# Altium PCB U2S_HVPP.PCBDOC
Units mm, origin at the board's own origin, x right, y up, seen from the top; angles counter-clockwise.
Board outline 114.3 x 63.5 mm, 2 copper layers (Top Layer, Bottom Layer); 54 components, 107 nets, 352 pads, 56 vias.
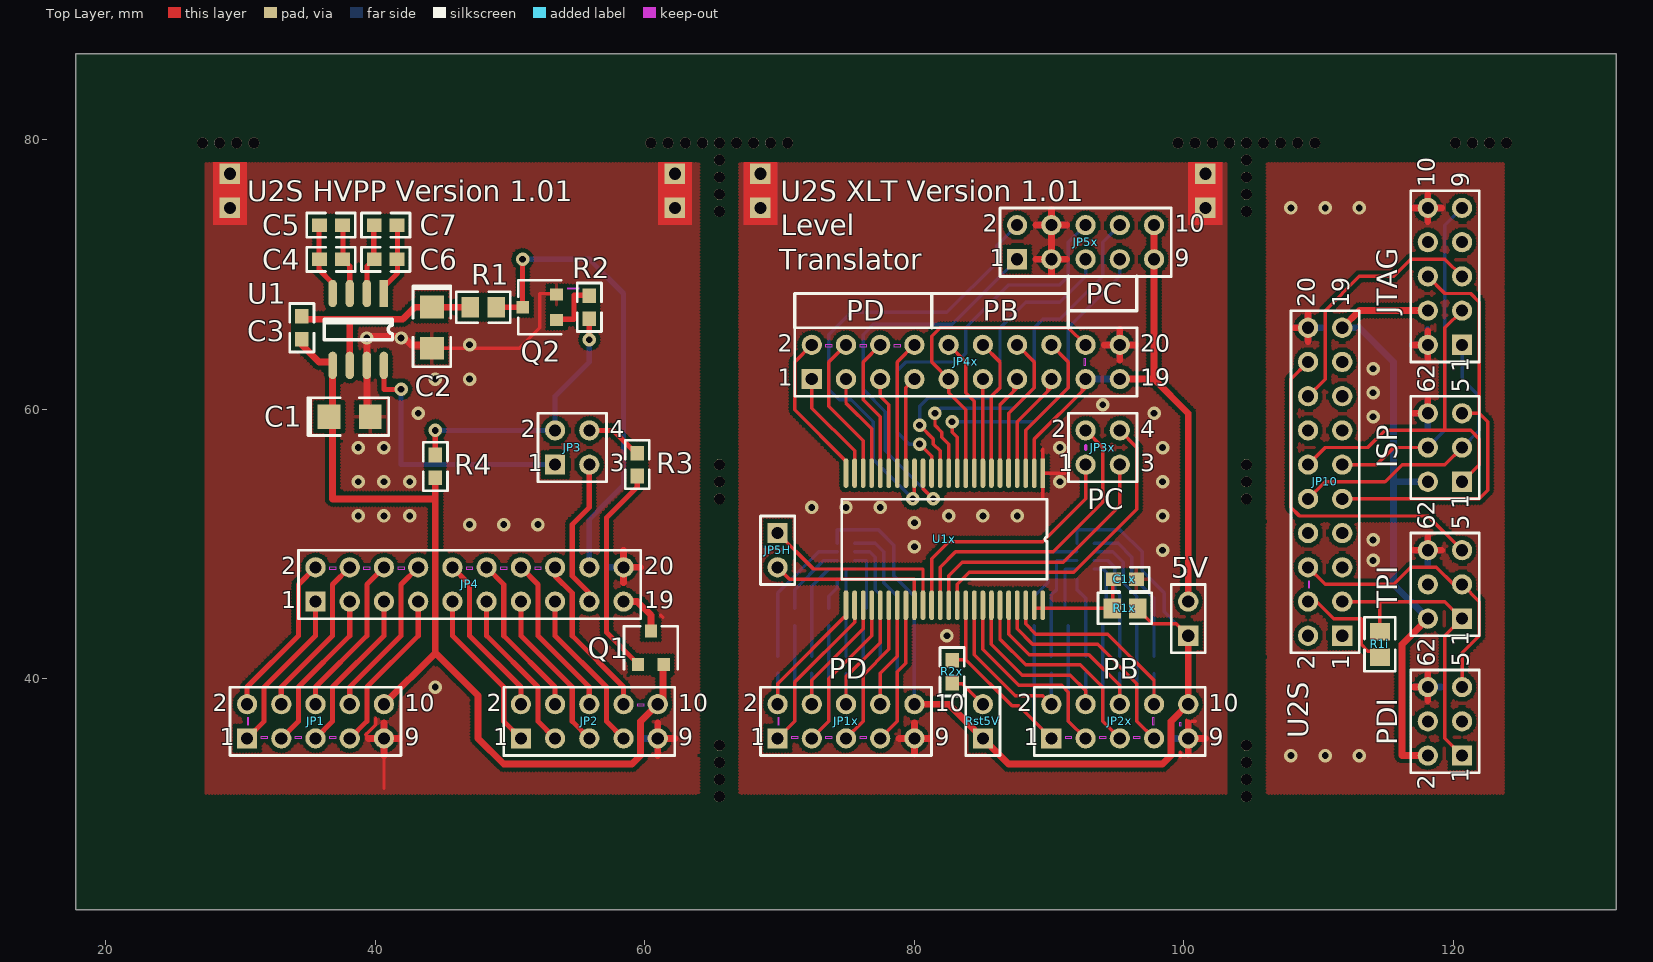
[diagram p0: Top Layer view]
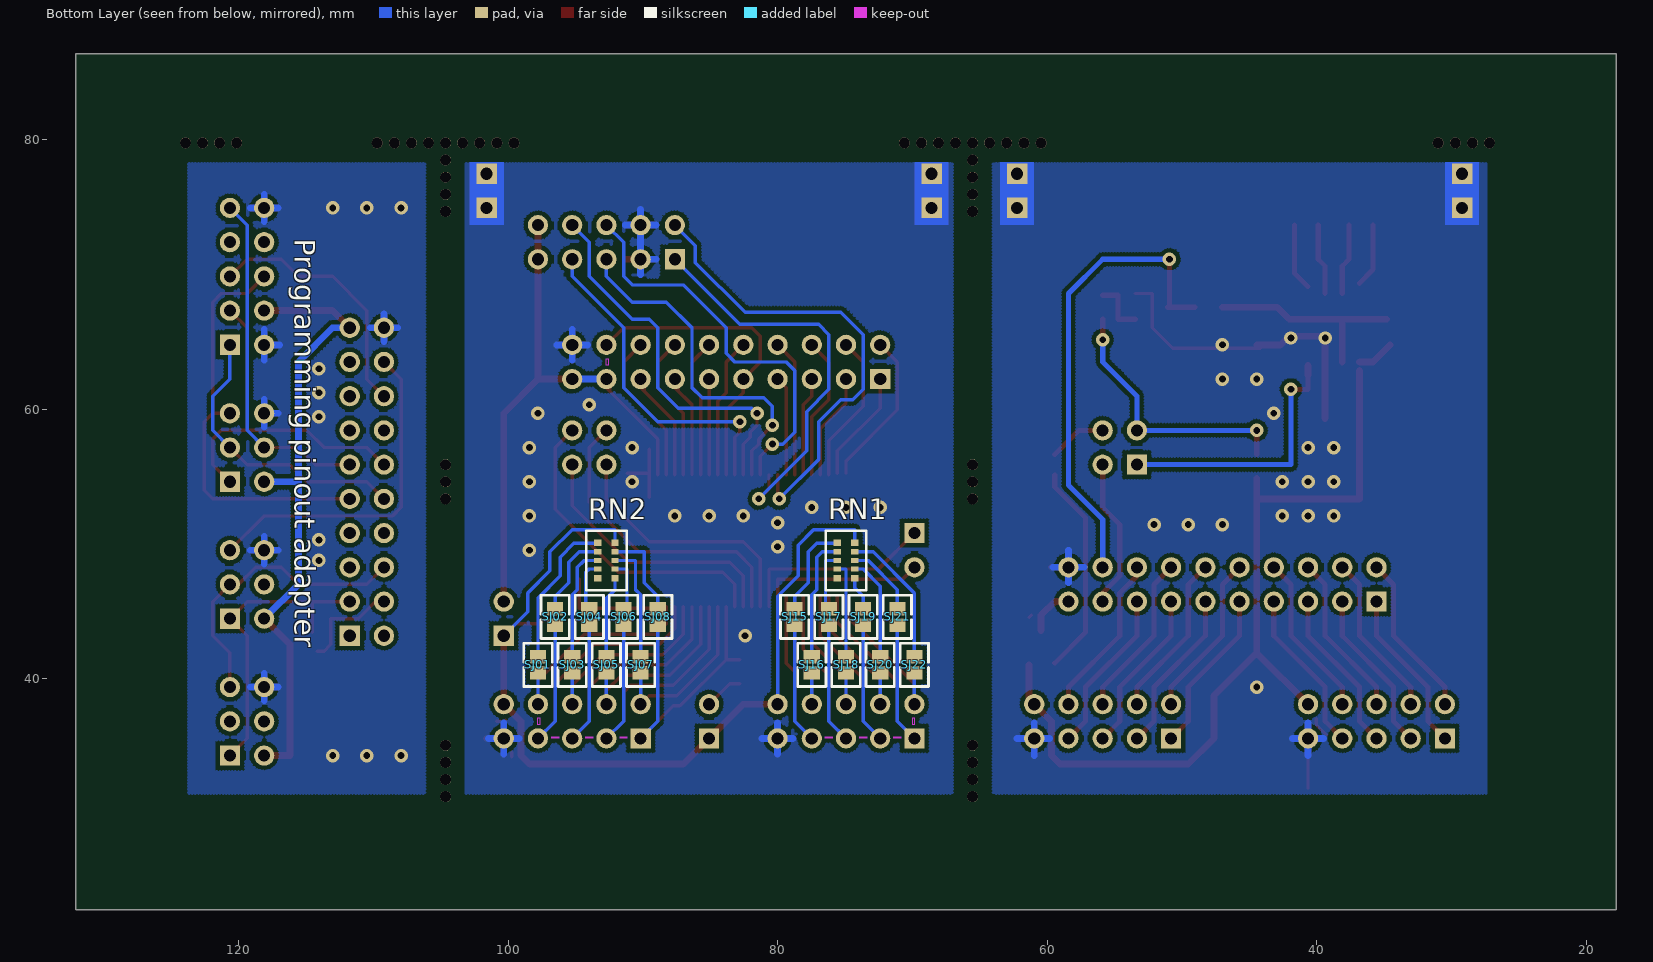
[diagram p1: Bottom Layer view, seen from below]

## Layer stack, top to bottom
Top Layer: signal copper 0.0356
Dielectric: dielectric 0.32, FR-4, Dk 4.8
Bottom Layer: signal copper 0.0356

## Board outline
17.78,22.86 132.08,22.86 132.08,86.36 17.78,86.36

## Design rules (kind name [scope] priority, off if disabled: settings)
Clearance Clearance_1 [inpoly] p1: gap=0.305
Clearance [All] p2: gap=0.178
ComponentClearance [All] p1: gap=0.254 collisioncheckmode=0
PolygonConnect [All] p1: connectstyle=Relief reliefconductorwidth=0.254 reliefentries=4 polygonreliefangle="90 Angle"
RoutingLayers [All] p1: top layer=Horizontal bottom layer=Vertical
RoutingVias [All] p1: holewidth=0.711 width=1.27 viastyle="Through Hole" minholewidth=0.711 minwidth=1.27 maxholewidth=0.711 maxwidth=1.27
SolderMaskExpansion [All] p1: expansion=0.178
TestPointUsage [All] p1: valid=0 allowmultiple=FALSE
Testpoint [All] p1: side=15 testpointundercomponent=TRUE minsize=1.016 maxsize=2.54 preferedsize=1.524 minholesize=0 maxholesize=1.016 preferedholesize=0.813 testpointgrid=0.025 style=1023 order=1234567890
Width [All] p1: maxlimit=2.54 minlimit=0.254 preferedwidth=0.254 minimp=50.000000 maximp=50.000000 favimp=50.000000
16 further rules are at their usual default settings.

## Classes and differential pairs
component class XLAT: 5V C1x JP1x JP2x JP3x JP4x JP5H JP5x R1x R2x RN1 RN2 Rst5V SJ01 SJ02 SJ03 SJ04 SJ05 SJ06 SJ07 SJ08 SJ15 SJ16 SJ17 SJ18 SJ19 SJ20 SJ21 SJ22 U1x
component class U2S_HVPP: C1 C2 C3 C4 C5 C6 C7 JP1 JP2 JP3 JP4 Q1 Q2 R1 R2 R3 R4 U1
component class ISP_JTAG: ISP JP10 JTAG PDI R1i TPI

## Components (designator, comment, footprint, x,y, rotation, side; value= is the part's Value field where it differs from the comment)
5V "Header 2" HDR1X2 100.33,43.18 r90 top
C1 "Capacitor Ta" TR3A 38.1,59.436 r0 top
C1x "Capacitor" SMD0603 95.631,47.371 r180 top
C2 "Capacitor Ta" TR3A 44.196,66.04 r270 top
C3 "Capacitor" SMD0603 34.544,66.04 r90 top
C4 "Capacitor" SMD0603 36.703,71.12 r0 top
C5 "Capacitor" SMD0603 36.703,73.66 r0 top
C6 "Capacitor" SMD0603 40.767,71.12 r180 top
C7 "Capacitor" SMD0603 40.767,73.66 r0 top
ISP "Header 3X2" HDR2X3 120.65,54.61 r90 top
JP1 "Header 5X2" HDR2X5 30.48,35.56 r0 top
JP1x "Header 5X2" HDR2X5 69.85,35.56 r0 top
JP2 "Header 5X2" HDR2X5 50.8,35.56 r0 top
JP2x "Header 5X2" HDR2X5 90.17,35.56 r0 top
JP3 "Header 2X2" HDR2X2#1 53.34,55.88 r0 top
JP3x "Header 2X2" HDR2X2#2 92.71,55.88 r0 top
JP4 "Header 10X2" HDR2X10 35.56,45.72 r0 top
JP4x "Header 10X2" HDR2X10 72.39,62.23 r0 top
JP5H "Header 2" HDR1X2 69.85,50.8 r270 top
JP5x "Header 5X2" HDR2X5 87.63,71.12 r0 top
JP10 "Header 10X2" HDR2X10 111.76,43.18 r90 top
JTAG "Header 5X2" HDR2X5 120.65,64.77 r90 top
PDI "Header 3X2" HDR2X3 120.65,34.29 r90 top
Q1 "BC857_PNP" SOT23 60.452,42.291 r0 top
Q2 "BC847_NPN" SOT23 52.197,67.564 r90 top
R1 "Resistor" SMD0805 48.006,67.564 r0 top
R1i "Resistor" SMD0805 114.554,42.545 r90 top
R1x "Resistor" SMD0805 95.631,45.212 r0 top
R2 "Resistor" SMD0603 55.88,67.564 r90 top
R2x "Resistor" SMD0603 82.804,40.513 r270 top
R3 "Resistor" SMD0603 59.436,55.88 r270 top
R4 "Resistor" SMD0603 44.45,55.753 r90 top
RN1 "YC158" YC158 74.93,48.768 r180 bottom
RN2 "YC158" YC158 92.71,48.768 r180 bottom
Rst5V "Header 2" HDR1X2 85.09,35.56 r90 top
SJ01 "Jumper" Jumper 97.79,41.021 r270 bottom
SJ02 "Jumper" Jumper 96.52,44.577 r270 bottom
SJ03 "Jumper" Jumper 95.25,41.021 r270 bottom
SJ04 "Jumper" Jumper 93.98,44.577 r270 bottom
SJ05 "Jumper" Jumper 92.71,41.021 r270 bottom
SJ06 "Jumper" Jumper 91.44,44.577 r270 bottom
SJ07 "Jumper" Jumper 90.17,41.021 r270 bottom
SJ08 "Jumper" Jumper 88.9,44.577 r270 bottom
SJ15 "Jumper" Jumper 78.74,44.577 r270 bottom
SJ16 "Jumper" Jumper 77.47,41.021 r270 bottom
SJ17 "Jumper" Jumper 76.2,44.577 r270 bottom
SJ18 "Jumper" Jumper 74.93,41.021 r270 bottom
SJ19 "Jumper" Jumper 73.66,44.577 r270 bottom
SJ20 "Jumper" Jumper 72.39,41.021 r270 bottom
SJ21 "Jumper" Jumper 71.12,44.577 r270 bottom
SJ22 "Jumper" Jumper 69.85,41.021 r270 bottom
TPI "Header 3X2" HDR2X3 120.65,44.45 r90 top
U1 "ST662" SO8 40.64,68.58 r270 top
U1x "GTL2000DL" SSOP48 89.535,55.245 r270 top

## Footprints (in the part's own frame and the unit in brackets; to place one, negate y for a bottom-side part, rotate by r counter-clockwise, add the part's x,y. Pads: shape width x height; smd on the part's side, far side on the other; paste and mask are expansions set on the pad)
HDR1X2 [mm] "Connector; Header; 2 Position"
  rect 1.5x1.5 hole 0.9: 1(0,0)
  round 1.5 hole 0.9: 2(2.54,0)
  silkscreen extent -1.27,-1.27 3.81,1.27
HDR2X2#1 [mm] "Connector; Header; 2x2 Position"
  rect 1.5x1.5 hole 0.9: 1(0,0)
  round 1.5 hole 0.9: 2(0,2.54) 3(2.54,0) 4(2.54,2.54)
  silkscreen extent -1.27,-1.27 3.81,3.81
HDR2X2#2 [mm] "Connector; Header; 2x2 Position"
  round 1.5 hole 0.9: 1(0,0) 2(0,2.54) 3(2.54,0) 4(2.54,2.54)
  silkscreen extent -1.27,-1.27 3.81,3.81
HDR2X3 [mm] "Connector; Header; 3x2 Position"
  rect 1.5x1.5 hole 0.9: 1(0,0)
  round 1.5 hole 0.9: 2(0,2.54) 3(2.54,0) 4(2.54,2.54) 5(5.08,0) 6(5.08,2.54)
  silkscreen extent -1.27,-1.27 6.35,3.81
HDR2X5 [mm] "Connector; Header; 5x2 Position"
  rect 1.5x1.5 hole 0.9: 1(0,0)
  round 1.5 hole 0.9: 2(0,2.54) 3(2.54,0) 4(2.54,2.54) 5(5.08,0) 6(5.08,2.54) 7(7.62,0) 8(7.62,2.54) 9(10.16,0) 10(10.16,2.54)
  silkscreen extent -1.27,-1.27 11.43,3.81
HDR2X10 [mm] "Connector; Header; 10x2 Position"
  rect 1.5x1.5 hole 0.9: 1(0,0)
  round 1.5 hole 0.9: 2(0,2.54) 3(2.54,0) 4(2.54,2.54) 5(5.08,0) 6(5.08,2.54) 7(7.62,0) 8(7.62,2.54) 9(10.16,0) 10(10.16,2.54) 11(12.7,0) 12(12.7,2.54) 13(15.24,0) 14(15.24,2.54) 15(17.78,0) 16(17.78,2.54) 17(20.32,0) 18(20.32,2.54) 19(22.86,0) 20(22.86,2.54)
  silkscreen extent -1.27,-1.27 24.13,3.81
Jumper [mm] "Solder Jumper"
  rect 1x1.2 smd: 1(-0.6,0) 2(0.6,0)
  silkscreen extent -1.6,-1.05 1.6,1.05
SMD0603 [mm]
  rect 1.1x1 smd: 1(-0.85,0) 2(0.85,0)
  silkscreen extent -1.8,-0.9 1.8,0.9
SMD0805 [mm]
  rect 1.3x1.5 smd: 1(-0.95,0) 2(0.95,0)
  silkscreen extent -2,-1.15 2,1.15
SO8 [mil]
  rect 80x25 smd: 1(0,0)
  oval 80x25 smd: 2(0,-50) 3(0,-100) 4(0,-150) 5(210,-150) 6(210,-100) 7(210,-50) 8(210,0)
  silkscreen extent 75,-175 135,25
SOT23 [mm]
  rect 0.9x0.95 smd: B(-0.95,-1.25) C(0,1.25) E(0.95,-1.25)
  silkscreen extent -2,-1.6 2,1.6
SSOP48 [mm]
  rect 2.2x0.35 smd: 1(0,0)
  oval 2.2x0.35 smd: 2(0,-0.635) 3(0,-1.27) 4(0,-1.905) 5(0,-2.54) 6(0,-3.175) 7(0,-3.81) 8(0,-4.445) 9(0,-5.08) 10(0,-5.715) 11(0,-6.35) 12(0,-6.985) 13(0,-7.62) 14(0,-8.255) 15(0,-8.89) 16(0,-9.525) 17(0,-10.16) 18(0,-10.795) 19(0,-11.43) 20(0,-12.065) 21(0,-12.7) 22(0,-13.335) 23(0,-13.97) 24(0,-14.605) 25(9.8,-14.605) 26(9.8,-13.97) 27(9.8,-13.335) 28(9.8,-12.7) 29(9.8,-12.065) 30(9.8,-11.43) 31(9.8,-10.795) 32(9.8,-10.16) 33(9.8,-9.525) 34(9.8,-8.89) 35(9.8,-8.255) 36(9.8,-7.62) 37(9.8,-6.985) 38(9.8,-6.35) 39(9.8,-5.715) 40(9.8,-5.08) 41(9.8,-4.445) 42(9.8,-3.81) 43(9.8,-3.175) 44(9.8,-2.54) 45(9.8,-1.905) 46(9.8,-1.27) 47(9.8,-0.635) 48(9.8,0)
  silkscreen extent 1.93,-14.92 7.87,0.32
TR3A [mm]
  rect 1.7x1.8 smd: 1(-1.525,0) 2(1.525,0)
  silkscreen extent -3.1,-1.4 2.9,1.4
YC158 [mm]
  rect 0.55x0.486 smd: 1(-0.636,1.33) 5(-0.635,-1.33) 6(0.635,-1.33) 10(0.635,1.33)
  rect 0.55x0.386 smd: 2(-0.635,0.64) 3(-0.635,0) 4(-0.635,-0.64) 7(0.635,-0.64) 8(0.635,0) 9(0.635,0.64)
  silkscreen extent -1.5,-2.2 1.5,2.2

## Part data
5V JP5H Rst5V: "Header, 2-Pin"
ISP PDI TPI: "Header, 3-Pin, Dual row"
JP1 JP1x JP2 JP2x JP5x JTAG: "Header, 5-Pin, Dual row"
JP3 JP3x: "Header, 2-Pin, Dual row"
JP4 JP4x JP10: "Header, 10-Pin, Dual row"
Q1: library part Transistor_PNP
Q2: library part Transistor_NPN
SJ01 SJ02 SJ03 SJ04 SJ05 SJ06 SJ07 SJ08 SJ15 SJ16 SJ17 SJ18 SJ19 SJ20 SJ21 SJ22: "Solder Jumper"

## Free pads (board coordinates)
  round 0.8 hole 0.8 unplated: 0(27.178,79.756) 0(28.448,79.756) 0(29.718,79.756) 0(30.988,79.756) 0(60.452,79.756) 0(61.722,79.756) 0(62.992,79.756) 0(64.262,79.756) 0(65.532,31.242) 0(65.532,32.512) 0(65.532,33.782) 0(65.532,35.052) 0(65.532,53.34) 0(65.532,54.61) 0(65.532,55.88) 0(65.532,74.676) 0(65.532,75.946) 0(65.532,77.216) 0(65.532,78.486) 0(65.532,79.756) 0(66.802,79.756) 0(68.072,79.756) 0(69.342,79.756) 0(70.612,79.756) 0(99.568,79.756) 0(100.838,79.756) 0(102.108,79.756) 0(103.378,79.756) 0(104.648,31.242) 0(104.648,32.512) 0(104.648,33.782) 0(104.648,35.052) 0(104.648,53.34) 0(104.648,54.61) 0(104.648,55.88) 0(104.648,74.676) 0(104.648,75.946) 0(104.648,77.216) 0(104.648,78.486) 0(104.648,79.756) 0(105.918,79.756) 0(107.188,79.756) 0(108.458,79.756) 0(109.728,79.756) 0(120.142,79.756) 0(121.412,79.756) 0(122.682,79.756) 0(123.952,79.756)
  rect 1.524x1.524 hole 0.9: P1(29.21,74.93) P1x(68.58,74.93) P2(29.21,77.47) P2x(68.58,77.47) P3(62.23,74.93) P3x(101.6,74.93) P4(62.23,77.47) P4x(101.6,77.47)

## Via types
v1: diameter 1, hole 0.5, Top Layer to Bottom Layer, tented both sides, 56 vias

## Nets (pads, with @x,y where several pads share a name; then routed paths per layer and width w, separated by ;. In a path a pad name is that pad's centre, name@x,y a point inside that pad or via, vN(x,y) a via of type N, cw(c..) or ccw(c..) an arc to the next point about the centre after c; other vN are vias at no path point)
C0: JP2.1 JP4.9 | length 12.3
  Top Layer w0.381: JP4.9 45.72,43.18 49.53,39.37 49.53,36.83 JP2.1
C1: JP2.2 JP4.10 | length 12.3
  Top Layer w0.381: JP4.10 46.99,46.99 46.99,43.18 50.8,39.37 JP2.2
C2: JP2.3 JP4.11 | length 12.3
  Top Layer w0.381: JP4.11 48.26,43.18 52.07,39.37 52.07,36.83 JP2.3
C3: JP2.4 JP4.12 | length 12.3
  Top Layer w0.381: JP4.12 49.53,46.99 49.53,43.18 53.34,39.37 JP2.4
C4: JP2.5 JP4.13 | length 12.3
  Top Layer w0.381: JP4.13 50.8,43.18 54.61,39.37 54.61,36.83 JP2.5
C5: JP2.6 JP4.14 | length 12.3
  Top Layer w0.381: JP4.14 52.07,46.99 52.07,43.18 55.88,39.37 JP2.6
C6: JP2.7 JP4.15 | length 12.3
  Top Layer w0.381: JP4.15 53.34,43.18 57.15,39.37 57.15,36.83 JP2.7
C7: JP2.8 JP4.16 | length 12.3
  Top Layer w0.381: JP4.16 53.34,47.625 54.61,46.355 54.61,43.18 58.42,39.37 JP2.8
D0: JP1.1 JP4.1 | length 12.3
  Top Layer w0.381: JP1.1 31.75,36.83 31.75,39.37 35.56,43.18 JP4.1
D1: JP1.2 JP4.2 | length 12.3
  Top Layer w0.381: JP1.2 30.48,39.37 34.29,43.18 34.29,46.99 JP4.2
D01: JP2x.8 SJ01.2 U1x.46 | length 16.6
  Top Layer w0.254: U1x.46@88.265,45.339 88.265,44.069 89.027,43.307 94.361,43.307 97.79,39.878 JP2x.8
  Bottom Layer w0.254: JP2x.8 SJ01.2@97.79,40.386
D2: JP1.3 JP4.3 | length 12.3
  Top Layer w0.381: JP1.3 34.29,36.83 34.29,39.37 38.1,43.18 JP4.3
D02: JP2x.7 SJ02.2 U1x.45 | length 25.7
  Top Layer w0.254: U1x.45@87.63,45.339 87.63,43.688 88.773,42.545 93.599,42.545 96.52,39.624 96.52,36.83 JP2x.7
  Bottom Layer w0.254: SJ02.2@96.52,43.942 96.52,36.83 JP2x.7
D3: JP1.4 JP4.4 | length 12.3
  Top Layer w0.381: JP1.4 33.02,39.37 36.83,43.18 36.83,46.99 JP4.4
D03: JP2x.6 SJ03.2 U1x.44 | length 15.5
  Top Layer w0.254: U1x.44@86.995,45.339 86.995,43.307 88.519,41.783 92.964,41.783 95.25,39.497 JP2x.6
  Bottom Layer w0.254: JP2x.6 SJ03.2@95.25,40.386
D4: JP1.5 JP4.5 | length 12.3
  Top Layer w0.381: JP1.5 36.83,36.83 36.83,39.37 40.64,43.18 JP4.5
D04: JP2x.5 SJ04.2 U1x.43 | length 24.8
  Top Layer w0.254: U1x.43@86.36,45.339 86.36,42.926 88.265,41.021 92.329,41.021 93.98,39.37 93.98,36.83 JP2x.5
  Bottom Layer w0.254: SJ04.2@93.98,43.942 93.98,36.83 JP2x.5
D5: JP1.6 JP4.6 | length 12.3
  Top Layer w0.381: JP1.6 35.56,39.37 39.37,43.18 39.37,46.99 JP4.6
D05: JP2x.4 SJ05.2 U1x.42 | length 14.5
  Top Layer w0.254: U1x.42@85.725,45.339 85.725,42.545 88.011,40.259 91.567,40.259 92.71,39.116 JP2x.4
  Bottom Layer w0.254: JP2x.4 SJ05.2@92.71,40.386
D6: JP1.7 JP4.7 | length 12.3
  Top Layer w0.381: JP1.7 39.37,36.83 39.37,39.37 43.18,43.18 JP4.7
D06: JP2x.3 SJ06.2 U1x.41 | length 23.7
  Top Layer w0.254: U1x.41@85.09,45.339 85.09,42.164 87.757,39.497 90.932,39.497 91.44,38.989 91.44,36.83 JP2x.3
  Bottom Layer w0.254: SJ06.2@91.44,43.942 91.44,36.83 JP2x.3
D7: JP1.8 JP4.8 | length 12.3
  Top Layer w0.381: JP1.8 38.1,39.37 41.91,43.18 41.91,46.99 JP4.8
D07: JP2x.2 SJ07.2 U1x.40 | length 13.1
  Top Layer w0.254: U1x.40@84.455,45.339 84.455,41.783 87.503,38.735 89.535,38.735 JP2x.2
  Bottom Layer w0.254: JP2x.2 SJ07.2@90.17,40.386
D08: JP2x.1 R2x.1 SJ08.2 U1x.39 | length 22.6
  Top Layer w0.254: R2x.1@82.804,41.402 83.82,41.402 ; U1x.39@83.82,45.339 83.82,41.402 ; JP2x.1 87.757,37.973 87.249,37.973 83.82,41.402
  Bottom Layer w0.254: SJ08.2@88.9,43.942 88.9,36.83 JP2x.1
D09: JP3x.4 U1x.38 | length 23.7
  Top Layer w0.254: U1x.38@83.185,45.339 83.185,46.99 84.074,47.879 91.821,47.879 96.52,52.578 96.52,57.15 JP3x.4
D10: JP3x.3 U1x.37 | length 20.2
  Top Layer w0.254: U1x.37@82.55,45.339 82.55,47.625 83.566,48.641 91.059,48.641 95.25,52.832 JP3x.3
D11: JP3x.2 U1x.36 | length 22.8
  Top Layer w0.254: U1x.36@81.915,45.339 81.915,48.26 83.058,49.403 90.297,49.403 93.98,53.086 93.98,57.15 JP3x.2
D12: JP3x.1 U1x.35 | length 19.4
  Top Layer w0.254: U1x.35@81.28,45.339 81.28,48.895 82.55,50.165 89.535,50.165 92.71,53.34 JP3x.1
D13: JP5H.1 U1x.34 | length 14.7
  Top Layer w0.254: JP5H.1 72.517,48.133 80.645,48.133 U1x.34@80.645,45.339
D14: JP5H.2 U1x.33 | length 12.6
  Top Layer w0.254: JP5H.2 70.739,47.371 80.01,47.371 U1x.33@80.01,45.339
D15: JP1x.7 SJ15.2 U1x.32 | length 20.2
  Top Layer w0.254: JP1x.7 78.74,36.83 78.74,40.513 79.375,41.148 U1x.32@79.375,46.101
  Bottom Layer w0.254: JP1x.7 78.74,36.83 SJ15.2@78.74,43.942
D16: JP1x.8 SJ16.2 U1x.31 | length 10.8
  Top Layer w0.254: JP1x.8 77.47,40.386 78.74,41.656 U1x.31@78.74,46.101
  Bottom Layer w0.254: JP1x.8 SJ16.2@77.47,40.386
D17: JP1x.5 SJ17.2 U1x.30 | length 20.8
  Top Layer w0.254: JP1x.5 76.2,36.83 76.2,40.259 78.105,42.164 U1x.30@78.105,46.101
  Bottom Layer w0.254: JP1x.5 76.2,36.83 SJ17.2@76.2,43.942
D18: JP1x.6 SJ18.2 U1x.29 | length 11.3
  Top Layer w0.254: JP1x.6 74.93,40.132 77.47,42.672 U1x.29@77.47,46.101
  Bottom Layer w0.254: JP1x.6 SJ18.2@74.93,40.386
D19: JP1x.3 SJ19.2 U1x.28 | length 21.3
  Top Layer w0.254: JP1x.3 73.66,36.83 73.66,40.005 76.835,43.18 U1x.28@76.835,46.101
  Bottom Layer w0.254: JP1x.3 73.66,36.83 SJ19.2@73.66,43.942
D20: JP1x.4 SJ20.2 U1x.27 | length 11.9
  Top Layer w0.254: JP1x.4 72.39,39.878 76.2,43.688 U1x.27@76.2,46.101
  Bottom Layer w0.254: JP1x.4 SJ20.2@72.39,40.386
D21: JP1x.1 SJ21.2 U1x.26 | length 21.8
  Top Layer w0.254: JP1x.1 71.12,36.83 71.12,39.751 75.565,44.196 U1x.26@75.565,46.101
  Bottom Layer w0.254: JP1x.1 71.12,36.83 SJ21.2@71.12,43.942
D22: JP1x.2 SJ22.2 U1x.25 | length 12.4
  Top Layer w0.254: JP1x.2 69.85,39.624 74.93,44.704 U1x.25@74.93,46.101
  Bottom Layer w0.254: JP1x.2 SJ22.2@69.85,40.386
GND: C1.2 C2.2 JP1.9 JP2.9 JP4.20 pad.P1 pad.P2 pad.P3 pad.P4 Q2.E U1.7 | length 54.9
  Top Layer w0.254: 39.294,35.839 40.03,36.576 40.03,37.008 ; 40.64,31.877 JP1.9@40.64,34.925 ; C2.2 50.673,64.516 52.197,66.04 52.197,68.58 Q2.E@53.467,68.58 ; 61.189,44.704 61.341,44.552
  Top Layer w0.508: C1.2@39.37,59.309 39.37,65.405 42.037,65.405 42.672,64.77 C2.2@44.45,64.77 ; 39.497,35.56 41.783,35.56 ; 40.64,34.29 40.64,36.703 ; 58.42,47.117 58.42,49.53 ; JP4.20 59.69,48.26 ; 60.96,34.29 60.96,36.703 ; JP2.9 62.23,35.56
  Bottom Layer w0.508: 39.497,35.56 41.783,35.56 ; 40.64,34.29 40.64,36.703 ; 57.277,48.26 59.563,48.26 ; 58.42,47.117 58.42,49.53 ; 59.817,35.56 62.23,35.56 ; 60.96,34.29 60.96,36.703
  other v1: 44.45,39.37 46.99,51.435 49.53,51.435 52.07,51.435 38.735,52.07 40.64,52.07 42.545,52.07 38.735,54.61 40.64,54.61 42.545,54.61 38.735,57.15 40.64,57.15 43.18,59.69 44.45,62.23 46.99,62.23 46.99,64.77 39.37,65.278 41.91,65.278
GNDX: C1x.1 JP1x.9 JP2x.9 JP4x.20 JP5x.3 JP5x.4 pad.P1x pad.P2x pad.P3x pad.P4x U1x.1 | length 50.1
  Top Layer w0.254: 89.535,53.467 89.535,57.023 ; U1x.1 91.186,55.245 ; 99.746,34.214 99.746,34.544 ; 100.203,36.627 100.203,36.906 ; 100.584,36.83 100.838,36.83
  Top Layer w0.508: 78.867,35.56 81.153,35.56 ; 80.01,34.417 80.01,36.703 ; 89.027,71.12 91.313,71.12 ; 89.027,73.66 91.313,73.66 ; 90.17,69.977 90.17,74.803 ; 94.107,64.77 96.393,64.77 ; 95.25,63.627 95.25,65.913 ; 100.33,34.417 100.33,36.703 ; JP2x.9 101.6,35.56
  Bottom Layer w0.508: 78.867,35.56 81.153,35.56 ; 80.01,34.417 80.01,36.703 ; 89.027,71.12 JP5x.3 ; 89.027,73.66 91.313,73.66 ; 90.17,69.977 90.17,74.803 ; 94.107,64.77 96.393,64.77 ; 95.25,63.627 95.25,65.913 ; 99.187,35.56 101.473,35.56 ; 100.33,34.417 100.33,36.703
  other v1: 82.423,43.18 98.425,49.53 80.01,49.784 80.01,51.562 82.55,52.07 85.09,52.07 87.63,52.07 98.425,52.07 72.39,52.705 74.93,52.705 77.47,52.705 90.805,54.61 98.425,54.61 90.805,57.15 98.425,57.15 97.79,59.69 93.98,60.325
HL: JP3.1 U1.8 | length 20.8
  Top Layer w0.381: U1.8 40.64,61.468 v1(41.91,61.468)
  Top Layer w0.508: U1.8@40.64,62.484 U1.8
  Bottom Layer w0.381: v1(41.91,61.468) 41.91,55.88 JP3.1
HVOUT: C2.1 C3.2 R1.1 U1.6 | length 15.7
  Top Layer w0.508: C3.2@34.798,66.675 42.037,66.675 42.926,67.564 R1.1@46.99,67.564 ; U1.6@38.1,63.5 38.1,66.675
ND01: RN2.1 SJ01.1 | length 11.3
  Bottom Layer w0.254: RN2.1@93.345,50.038 95.123,50.038 96.139,49.022 96.139,47.625 97.79,45.974 SJ01.1@97.79,41.656
ND02: RN2.2 SJ02.1 | length 6.3
  Bottom Layer w0.254: RN2.2@93.345,49.403 94.742,49.403 95.504,48.641 95.504,47.117 96.52,46.101 SJ02.1@96.52,45.212
ND03: RN2.3 SJ03.1 | length 8.5
  Bottom Layer w0.254: RN2.3 94.361,48.768 94.869,48.26 94.869,46.609 95.25,46.228 SJ03.1@95.25,41.656
ND04: RN2.4 SJ04.1 | length 3.7
  Bottom Layer w0.254: RN2.4@93.345,48.133 93.98,48.133 94.234,47.879 SJ04.1@94.234,45.212
ND05: RN2.6 SJ05.1 | length 6
  Bottom Layer w0.254: RN2.6@92.075,47.371 92.075,46.609 92.71,45.974 SJ05.1@92.71,41.656
ND06: RN2.7 SJ06.1 | length 3.8
  Bottom Layer w0.254: SJ06.1@91.186,45.212 91.186,48.133 RN2.7@92.075,48.133
ND07: RN2.8 SJ07.1 | length 8.8
  Bottom Layer w0.254: SJ07.1@90.17,41.656 90.17,46.228 90.551,46.609 90.551,48.768 RN2.8
ND08: RN2.9 SJ08.1 | length 6.8
  Bottom Layer w0.254: SJ08.1@88.9,45.212 88.9,46.101 89.916,47.117 89.916,49.403 RN2.9@92.075,49.403
ND15: RN1.1 SJ15.1 | length 7
  Bottom Layer w0.254: RN1.1@75.565,50.038 77.089,50.038 77.724,49.403 77.724,47.117 78.74,46.101 SJ15.1@78.74,45.212
ND16: RN1.2 SJ16.1 | length 9.2
  Bottom Layer w0.254: RN1.2@75.565,49.403 76.708,49.403 77.089,49.022 77.089,46.609 77.47,46.228 SJ16.1@77.47,41.656
ND17: RN1.3 SJ17.1 | length 4.4
  Bottom Layer w0.254: RN1.3 76.454,48.768 SJ17.1@76.454,45.212
ND18: RN1.4 SJ18.1 | length 7.1
  Bottom Layer w0.254: SJ18.1@74.93,41.656 74.93,48.133 RN1.4@75.565,48.133
ND19: RN1.6 SJ19.1 | length 2.4
  Bottom Layer w0.254: SJ19.1@73.66,45.212 73.66,46.101 74.295,46.736 RN1.6@74.295,47.371
ND20: RN1.7 SJ20.1 | length 7.6
  Bottom Layer w0.254: SJ20.1@72.39,41.656 72.39,46.863 73.66,48.133 RN1.7@74.295,48.133
ND21: RN1.8 SJ21.1 | length 5.5
  Bottom Layer w0.254: SJ21.1@71.12,45.212 71.12,46.609 73.279,48.768 RN1.8
ND22: RN1.9 SJ22.1 | length 10.4
  Bottom Layer w0.254: SJ22.1@69.85,41.656 69.85,46.355 72.898,49.403 RN1.9@74.295,49.403
P_CLK: ISP.3 JP10.10 JTAG.1 | length 21.7
  Top Layer w0.254: JP10.10 110.49,54.61 114.935,54.61 116.205,55.88 119.38,55.88 ISP.3
  Bottom Layer w0.254: ISP.3 121.92,58.42 121.92,60.96 120.65,62.23 JTAG.1
P_IN: ISP.1 JP10.12 JTAG.3 | length 27.1
  Top Layer w0.254: JP10.12 110.49,57.15 113.665,57.15 114.935,58.42 121.285,58.42 121.92,57.785 121.92,55.88 ISP.1 ; 119.38,58.42 119.38,66.04 JTAG.3
P_OUT: ISP.4 JP10.11 JTAG.9 | length 25.7
  Top Layer w0.254: JP10.11 114.3,55.88 115.57,57.15 ISP.4
  Bottom Layer w0.254: ISP.4 119.38,58.42 119.38,73.66 JTAG.9
P_RST: ISP.5 JP10.9 JTAG.6 | length 31.2
  Top Layer w0.254: JP10.9 121.92,53.34 122.555,53.975 122.555,59.055 121.92,59.69 ; JTAG.6 119.38,68.58 121.285,68.58 121.92,67.945 121.92,59.69 ; ISP.5 121.92,59.69
PCLK: JP10.6 PDI.5 TPI.3 | length 21.7
  Top Layer w0.254: JP10.6 110.49,46.99 115.57,46.99 116.84,48.26 118.745,48.26 120.015,46.99 TPI.3 121.92,45.72 121.92,43.18 120.65,41.91 PDI.5
PD_TX: JP10.4 R1i.1 | length 7.6
  Top Layer w0.254: JP10.4 109.855,45.72 111.125,44.45 113.157,44.45 113.157,42.545 113.665,42.037 R1i.1@114.173,42.037
PDATA: JP10.3 PDI.1 R1i.2 TPI.1 | length 22.9
  Top Layer w0.254: JP10.3 114.554,45.72 ; R1i.2@114.554,43.434 114.554,45.72 ; PDI.1 119.38,35.56 119.38,43.18 TPI.1 119.38,45.72 114.554,45.72
PGND: ISP.6 JP10.20 JTAG.2 JTAG.10 PDI.6 TPI.6 | length 41
  Top Layer w0.508: 108.204,66.04 JP10.20 ; 109.22,65.024 109.22,67.056 ; 117.094,39.37 PDI.6 ; 117.094,49.53 119.126,49.53 ; 117.094,59.69 ISP.6 118.11,60.706 ; 117.094,64.77 JTAG.2 ; 117.094,74.93 119.126,74.93 ; 118.11,38.354 118.11,40.386 ; TPI.6 118.11,50.546 ; 118.11,63.754 118.11,65.786 ; 118.11,73.914 118.11,75.946
  Bottom Layer w0.508: 108.204,66.04 110.236,66.04 ; 109.22,65.024 109.22,67.056 ; 116.967,64.77 JTAG.2 ; 117.094,39.37 119.126,39.37 ; 117.094,49.53 119.126,49.53 ; 117.094,59.69 ISP.6 ; 117.094,74.93 119.126,74.93 ; 118.11,38.354 118.11,40.386 ; 118.11,48.514 118.11,50.546 ; 118.11,58.674 118.11,60.706 ; 118.11,63.627 118.11,65.913 ; 118.11,73.914 118.11,75.946
  other v1: 107.95,34.29 110.49,34.29 113.03,34.29 114.046,48.768 114.046,50.292 114.046,59.436 114.046,61.214 114.046,62.992 107.95,74.93 110.49,74.93 113.03,74.93
PWR_B: Q1.B R3.2 | length 15.9
  Top Layer w0.381: Q1.B@59.436,41.148 57.15,43.434 57.15,51.943 59.436,54.229 R3.2@59.436,55.118
PWR_LOW: JP3.4 R3.1 | length 4.3
  Top Layer w0.381: JP3.4 57.658,58.42 R3.1@59.436,56.642
RST: JP4.18 Q2.C R1.2 | length 35.5
  Top Layer w0.381: R1.2@49.022,67.564 Q2.C@51.054,67.564 ; Q2.C@50.927,67.564 v1(50.927,71.12)
  Bottom Layer w0.381: v1(50.927,71.12) 55.88,71.12 58.42,68.58 58.42,54.356 55.88,51.816 JP4.18
RST_B: Q2.B R2.2 | length 4.2
  Top Layer w0.381: Q2.B@53.467,66.675 54.737,66.675 54.737,68.453 R2.2@55.88,68.453
RST_LOW: JP3.2 R2.1 R4.2 | length 20
  Top Layer w0.381: R4.2@44.45,56.642 v1(44.45,58.42) ; v1(55.88,65.151) R2.1@55.88,66.675
  Bottom Layer w0.381: v1(44.45,58.42) JP3.2 53.34,60.96 55.88,63.5 v1(55.88,65.151)
S01: JP4x.16 U1x.3 | length 11.5
  Top Layer w0.254: U1x.3@88.265,55.118 88.265,58.42 91.44,61.595 91.44,63.5 JP4x.16
S02: JP4x.15 U1x.4 | length 8.5
  Top Layer w0.254: U1x.4@87.63,55.118 87.63,59.055 90.17,61.595 JP4x.15 ; 89.916,61.341 JP4x.15@89.916,61.722
S03: JP4x.14 U1x.5 | length 11
  Top Layer w0.254: U1x.5@86.995,55.118 86.995,59.69 88.9,61.595 88.9,63.5 JP4x.14
S04: JP4x.13 U1x.6 | length 8
  Top Layer w0.254: U1x.6@86.36,55.118 86.36,60.325 87.63,61.595 JP4x.13 ; 87.376,61.341 JP4x.13@87.376,61.722
S05: JP4x.12 U1x.7 | length 10.4
  Top Layer w0.254: JP4x.12 86.36,63.5 86.36,61.595 85.725,60.96 U1x.7@85.725,55.118
S06: JP4x.11 U1x.8 | length 7.1
  Top Layer w0.254: U1x.8@85.09,55.118 JP4x.11
S07: JP4x.10 U1x.9 | length 10.4
  Top Layer w0.254: JP4x.10 83.82,63.5 83.82,61.214 84.455,60.579 U1x.9@84.455,55.118
S08: JP4x.9 JP4x.18 U1x.10 | length 23.6
  Top Layer w0.254: U1x.10@83.82,55.118 83.82,59.944 82.55,61.214 JP4x.9 81.28,63.5 81.28,65.405 81.915,66.04 91.44,66.04 JP4x.18
S09: JP5x.7 U1x.11 | length 24.9
  Top Layer w0.254: v1(82.804,59.055) 82.804,58.293 83.185,57.912 U1x.11@83.185,55.118
  Bottom Layer w0.254: v1(82.804,59.055) 88.9,59.055 91.44,61.595 91.44,66.04 95.25,69.85 JP5x.7
S10: JP5x.8 U1x.12 | length 29.1
  Top Layer w0.254: v1(81.534,59.69) 81.534,58.801 82.042,58.293 82.042,57.912 82.55,57.404 U1x.12@82.55,55.118
  Bottom Layer w0.254: v1(81.534,59.69) 81.915,60.071 87.376,60.071 88.9,61.595 88.9,66.04 89.535,66.675 90.805,66.675 93.98,69.85 93.98,72.39 JP5x.8 ; v1@81.661,59.69 82.042,60.071
S11: JP5x.5 U1x.13 | length 25.9
  Top Layer w0.254: v1(80.391,58.801) 81.407,57.785 81.407,57.404 81.915,56.896 U1x.13@81.915,55.118
  Bottom Layer w0.254: v1(80.391,58.801) 80.391,60.198 81.026,60.833 85.598,60.833 86.36,61.595 86.36,66.04 88.265,67.945 90.805,67.945 92.71,69.85 JP5x.5
S12: JP5x.6 U1x.14 | length 30.3
  Top Layer w0.254: v1(80.391,57.404) 81.28,56.515 U1x.14@81.28,55.118
  Bottom Layer w0.254: v1(80.391,57.404) 79.629,57.404 78.74,58.293 78.74,62.865 79.375,63.5 83.185,63.5 83.82,64.135 83.82,66.04 86.995,69.215 90.805,69.215 91.44,69.85 91.44,72.39 JP5x.6
S13: JP5x.1 U1x.15 | length 30.2
  Top Layer w0.254: U1x.15@80.645,55.118 80.645,54.102 v1(81.407,53.34)
  Bottom Layer w0.254: v1(81.407,53.34) 77.851,56.896 77.851,59.817 76.2,61.468 76.2,65.532 76.962,66.294 82.804,66.294 JP5x.1
S14: JP5x.2 U1x.16 | length 35.2
  Top Layer w0.254: v1(79.883,53.34) 80.01,53.467 U1x.16@80.01,55.118
  Bottom Layer w0.254: v1(79.883,53.34) 76.962,56.261 76.962,59.055 75.311,60.706 74.422,60.706 73.66,61.468 73.66,65.532 75.311,67.183 82.423,67.183 86.106,70.866 86.106,72.136 JP5x.2
S15: JP4x.7 U1x.17 | length 7.4
  Top Layer w0.254: U1x.17@79.375,55.118 79.375,61.595 JP4x.7
S16: JP4x.8 U1x.18 | length 10.2
  Top Layer w0.254: U1x.18@78.74,55.118 78.74,63.5 JP4x.8
S17: JP4x.5 U1x.19 | length 7.2
  Top Layer w0.254: JP4x.5 77.47,60.96 78.105,60.325 U1x.19
S18: JP4x.6 U1x.20 | length 10.7
  Top Layer w0.254: U1x.20@77.47,55.118 77.47,59.436 76.2,60.706 76.2,63.5 JP4x.6
S19: JP4x.3 U1x.21 | length 7.9
  Top Layer w0.254: JP4x.3 74.93,60.452 76.835,58.547 U1x.21@76.835,55.118
S20: JP4x.4 U1x.22 | length 11.2
  Top Layer w0.254: JP4x.4 73.66,63.5 73.66,60.198 76.2,57.658 U1x.22@76.2,55.118
S21: JP4x.1 U1x.23 | length 8.3
  Top Layer w0.254: JP4x.1 72.39,60.071 75.565,56.896 U1x.23
S22: JP4x.2 U1x.24 | length 11.6
  Top Layer w0.254: JP4x.2 71.12,63.5 71.12,59.944 74.93,56.134 U1x.24
T_RST: JP10.18 TPI.5 | length 26.2
  Top Layer w0.254: JP10.18 107.95,62.23 107.95,52.705 108.585,52.07 118.11,52.07 ; 118.745,51.435 118.11,52.07 ; TPI.5 118.11,52.07
TMS: JP10.16 JTAG.5 | length 19.1
  Top Layer w0.254: JP10.16 110.49,62.23 110.49,67.31 113.03,69.85 115.57,69.85 116.84,71.12 119.38,71.12 JTAG.5
U11: C6.1 C7.2 U1.1 | length 5
  Top Layer w0.381: U1.1@40.64,69.088 41.656,70.104 C7.2@41.656,73.66
U12: C6.2 C7.1 U1.2 | length 5.3
  Top Layer w0.381: U1.2 39.37,70.612 39.878,71.12 C7.1@39.878,73.66
U13: C4.2 C5.2 U1.3 | length 5.3
  Top Layer w0.381: C5.2@37.592,73.66 37.592,71.12 38.1,70.612 U1.3
U14: C4.1 C5.1 U1.4 | length 4.7
  Top Layer w0.381: C5.1@35.814,73.66 35.814,70.358 U1.4@36.83,69.342
VC5V: R2x.2 Rst5V.2 | length 2.9
  Top Layer w0.254: R2x.2@82.804,39.624 83.566,39.624 Rst5V.2
VCC: C1.1 C3.1 JP1.10 JP2.10 Q1.E R4.1 U1.5 | length 66.2
  Top Layer w0.508: C3.1@34.544,64.77 35.814,63.5 U1.5@36.83,63.5 ; U1.5@36.83,62.865 36.83,53.34 44.45,53.34 ; JP1.10 44.45,41.91 ; R4.1@44.45,54.864 44.45,53.34 ; JP2.10 59.69,36.83 59.69,34.29 59.055,33.655 49.53,33.655 47.625,35.56 47.625,38.735 44.45,41.91 ; JP2.10@61.341,38.227 Q1.E@61.341,41.021 ; 44.45,41.91 44.45,53.34
VCCX: 5V.1 JP1x.10 JP2x.10 R1x.2 RN1.10 RN2.10 Rst5V.1 | length 67.4
  Top Layer w0.254: R1x.2@96.52,45.212 97.663,44.069 99.441,44.069 5V.1
  Top Layer w0.508: JP1x.10 82.55,38.1 86.995,33.655 98.425,33.655 99.06,34.29 99.06,36.83 JP2x.10 5V.1
  Bottom Layer w0.254: RN1.10@74.295,50.038 74.295,51.054 77.343,51.054 78.486,49.911 78.486,47.625 80.01,46.101 JP1x.10@80.01,38.227 ; RN2.10@92.075,50.038 92.075,51.054 95.25,51.054 96.901,49.403 96.901,48.006 98.552,46.355 98.552,44.958 5V.1
VREF: C1x.2 R1x.1 U1x.47 U1x.48 | length 8
  Top Layer w0.254: U1x.47@88.9,45.212 94.742,45.212 C1x.2@94.742,47.371
VT: ISP.2 JP10.19 JTAG.4 PDI.2 TPI.2 | length 47.2
  Top Layer w0.508: JP10.19 113.03,67.31 JTAG.4 ; PDI.2 116.205,34.29 116.205,42.545 TPI.2
  Bottom Layer w0.508: JP10.19 113.03,66.04 115.57,63.5 115.57,46.99 TPI.2 ; 115.57,54.61 ISP.2
VTG: JP4.19 Q1.C | length 3.6
  Top Layer w0.508: JP4.19 59.436,45.72 60.452,44.704 Q1.C@60.452,43.561
VXL: 5V.2 JP4x.17 JP4x.19 JP5x.9 JP5x.10 U1x.2 | length 43.1
  Top Layer w0.254: U1x.2@88.9,55.118 88.9,57.785 92.71,61.595 JP4x.17 ; 92.456,61.341 JP4x.17@92.456,61.722
  Top Layer w0.508: JP4x.19 97.79,62.23 ; JP5x.10 97.79,62.23 ; 5V.2 100.33,59.69 97.79,62.23
  Bottom Layer w0.508: JP4x.17 JP4x.19
XT: JP3.3 JP4.17 | length 11.2
  Top Layer w0.381: JP4.17 55.88,46.355 54.61,47.625 54.61,51.435 55.88,52.705 JP3.3
pads on no net: JP10.1 JP10.2 JP10.5 JP10.7 JP10.8 JP10.13 JP10.14 JP10.15 JP10.17 JTAG.7 JTAG.8 PDI.3 PDI.4 RN1.5 RN2.5 TPI.4

## Polygon pours and split planes (outlines as drawn)
PGND on Top Layer (hatched 90Degree grid 0.229 track 0.254, remove dead copper): 106.172,78.232 123.698,78.232 123.698,31.496 106.172,31.496
GNDX on Top Layer (hatched 90Degree grid 0.229 track 0.254, remove dead copper): 66.802,78.232 103.124,78.232 103.124,31.496 67.056,31.496 67.056,78.232
GND on Top Layer (hatched 90Degree grid 0.229 track 0.254, remove dead copper): 27.432,78.232 64.008,78.232 64.008,31.496 27.432,31.496
GNDX on Bottom Layer (hatched 90Degree grid 0.229 track 0.254, remove dead copper): 66.802,78.232 103.124,78.232 103.124,31.496 67.056,31.496 67.056,78.232
GND on Bottom Layer (hatched 90Degree grid 0.229 track 0.254, remove dead copper): 27.432,78.232 64.008,78.232 64.008,31.496 27.432,31.496
PGND on Bottom Layer (hatched 90Degree grid 0.229 track 0.254, remove dead copper): 106.172,78.232 123.698,78.232 123.698,31.496 106.172,31.496

## Keep-outs
Top Layer:
  region: 78.994,64.77 78.486,64.77 78.486,64.643 78.994,64.643
  region: 76.454,64.77 75.946,64.77 75.946,64.643 76.454,64.643
  region: 73.914,64.77 73.406,64.77 73.406,64.643 73.914,64.643
  region: 55.118,68.961 54.229,68.961 54.229,68.936 55.118,68.936
  region: 30.607,36.576 30.607,37.084 30.48,37.084 30.48,36.576
  rectangle: 31.496,35.56 32.004,35.687
  rectangle: 34.036,35.56 34.544,35.687
  rectangle: 36.576,35.56 37.084,35.687
  rectangle: 59.436,37.973 59.944,38.1
  rectangle: 51.816,48.133 52.324,48.26
  rectangle: 49.276,48.133 49.784,48.26
  rectangle: 46.736,48.133 47.244,48.26
  rectangle: 41.656,48.133 42.164,48.26
  rectangle: 39.116,48.133 39.624,48.26
  rectangle: 36.576,48.133 37.084,48.26
  rectangle: 99.67,36.5 99.797,36.728
  rectangle: 109.22,46.736 109.347,47.244
  lines w0.254: 92.71,57.023 92.71,57.277
Keep-Out Layer:
  region: 92.583,63.754 92.583,63.246 92.71,63.246 92.71,63.754
  region: 97.79,36.576 97.79,37.084 97.663,37.084 97.663,36.576
  rectangle: 96.266,35.56 96.774,35.687
  rectangle: 93.726,35.56 94.234,35.687
  rectangle: 91.186,35.56 91.694,35.687
  rectangle: 69.85,36.576 69.977,37.084
  rectangle: 70.866,35.56 71.374,35.687
  rectangle: 73.406,35.56 73.914,35.687
  rectangle: 75.946,35.56 76.454,35.687

## Other copper
Top Layer:
  rectangle net GNDX: 100.33,73.66 102.87,78.359
  rectangle net GNDX: 67.31,73.66 69.85,78.359
  rectangle net GND: 60.96,73.66 63.5,78.359
  rectangle net GND: 27.94,73.66 30.48,78.359
Bottom Layer:
  rectangle net GNDX: 100.33,73.66 102.87,78.359
  rectangle net GNDX: 67.31,73.66 69.85,78.359
  rectangle net GND: 60.96,73.66 63.5,78.359
  rectangle net GND: 27.94,73.66 30.48,78.359

## Silkscreen, mask and mechanical layers (free items; w line width, h text height)
Top Overlay:
  lines w0.254: 36.195,66.421 41.275,66.421 ; 71.12,66.04 71.12,68.58 81.28,68.58 ; 81.28,66.04 81.28,68.58 ; 91.44,66.04 91.44,69.85 ; 91.44,67.31 96.52,67.31 96.52,69.85 ; 91.44,68.58 81.28,68.58
  text "U2S HVPP Version 1.01" at 30.48,75.438 h1.52
  text "U2S XLT Version 1.01" at 70.104,75.438 h1.52
  text "Level" at 70.104,72.898 h1.52
  text "Translator" at 69.977,70.358 h1.52
  text "PC" at 92.71,67.818 h1.52
  text "PD" at 74.93,66.548 h1.52
  text "PB" at 85.09,66.548 h1.52
  text "PC" at 92.837,52.578 h1.52
  text "PD" at 73.66,40.005 h1.52
  text "PB" at 93.98,40.005 h1.52
  text "U2S" at 109.22,35.56 h1.52 r90
Bottom Overlay:
  text "Programming pinout adapter" at 115.824,72.644 h1.52 r90
Mechanical 1:
  lines w0.8: 25.908,79.756 25.908,30.772 125.222,30.772 125.222,79.756 ; 32.258,79.756 59.182,79.756 ; 65.532,36.322 65.532,52.07 ; 65.532,57.15 65.532,73.406 ; 71.882,79.756 98.298,79.756 ; 104.648,36.322 104.648,52.07 ; 104.648,57.15 104.648,73.406 ; 110.998,79.756 118.872,79.756

## Text inside footprints (layer, text, board x,y; h text height)
ISP: Top Overlay "1" at 121.158,52.578 h1.27 r90; Top Overlay "2" at 118.618,52.07 h1.27 r90; Top Overlay "5" at 121.158,61.214 h1.27 r90; Top Overlay "6" at 118.618,61.214 h1.27 r90
JP1: Top Overlay "10" at 42.164,37.592 h1.27; Top Overlay "9" at 42.164,35.052 h1.27; Top Overlay "1" at 28.448,35.052 h1.27; Top Overlay "2" at 27.94,37.592 h1.27
JP1x: Top Overlay "2" at 67.31,37.592 h1.27; Top Overlay "1" at 67.818,35.052 h1.27; Top Overlay "9" at 81.534,35.052 h1.27; Top Overlay "10" at 81.534,37.592 h1.27
JP2: Top Overlay "10" at 62.484,37.592 h1.27; Top Overlay "9" at 62.484,35.052 h1.27; Top Overlay "1" at 48.768,35.052 h1.27; Top Overlay "2" at 48.26,37.592 h1.27
JP2x: Top Overlay "2" at 87.63,37.592 h1.27; Top Overlay "1" at 88.138,35.052 h1.27; Top Overlay "9" at 101.854,35.052 h1.27; Top Overlay "10" at 101.854,37.592 h1.27
JP3: Top Overlay "1" at 51.308,55.372 h1.27; Top Overlay "2" at 50.8,57.912 h1.27; Top Overlay "4" at 57.404,57.912 h1.27; Top Overlay "3" at 57.404,55.372 h1.27
JP3x: Top Overlay "3" at 96.774,55.372 h1.27; Top Overlay "4" at 96.774,57.912 h1.27; Top Overlay "2" at 90.17,57.912 h1.27; Top Overlay "1" at 90.678,55.372 h1.27
JP4: Top Overlay "20" at 59.944,47.752 h1.27; Top Overlay "19" at 59.944,45.212 h1.27; Top Overlay "1" at 33.02,45.212 h1.27; Top Overlay "2" at 33.02,47.752 h1.27
JP4x: Top Overlay "2" at 69.85,64.262 h1.27; Top Overlay "1" at 69.85,61.722 h1.27; Top Overlay "19" at 96.774,61.722 h1.27; Top Overlay "20" at 96.774,64.262 h1.27
JP5x: Top Overlay "10" at 99.314,73.152 h1.27; Top Overlay "9" at 99.314,70.612 h1.27; Top Overlay "1" at 85.598,70.612 h1.27; Top Overlay "2" at 85.09,73.152 h1.27
JP10: Top Overlay "20" at 109.728,67.564 h1.27 r90; Top Overlay "19" at 112.268,67.564 h1.27 r90; Top Overlay "1" at 112.268,40.64 h1.27 r90; Top Overlay "2" at 109.728,40.64 h1.27 r90
JTAG: Top Overlay "10" at 118.618,76.454 h1.27 r90; Top Overlay "9" at 121.158,76.454 h1.27 r90; Top Overlay "1" at 121.158,62.738 h1.27 r90; Top Overlay "2" at 118.618,62.23 h1.27 r90
PDI: Top Overlay "1" at 121.158,32.258 h1.27 r90; Top Overlay "2" at 118.618,31.75 h1.27 r90; Top Overlay "5" at 121.158,40.894 h1.27 r90; Top Overlay "6" at 118.618,40.894 h1.27 r90
TPI: Top Overlay "1" at 121.158,42.418 h1.27 r90; Top Overlay "2" at 118.618,41.91 h1.27 r90; Top Overlay "5" at 121.158,51.054 h1.27 r90; Top Overlay "6" at 118.618,51.054 h1.27 r90